# Altium PCB Super_Hornet.PcbDoc (part 2 of 4)
Units mil, origin at the board's own origin, x right, y up, seen from the top; angles counter-clockwise.
Board outline 6000 x 4000 mil, 2 copper layers (Top Layer, Bottom Layer); 166 components, 85 nets, 398 pads, 0 vias.
Unrouted connection lines stored in the file: 74.
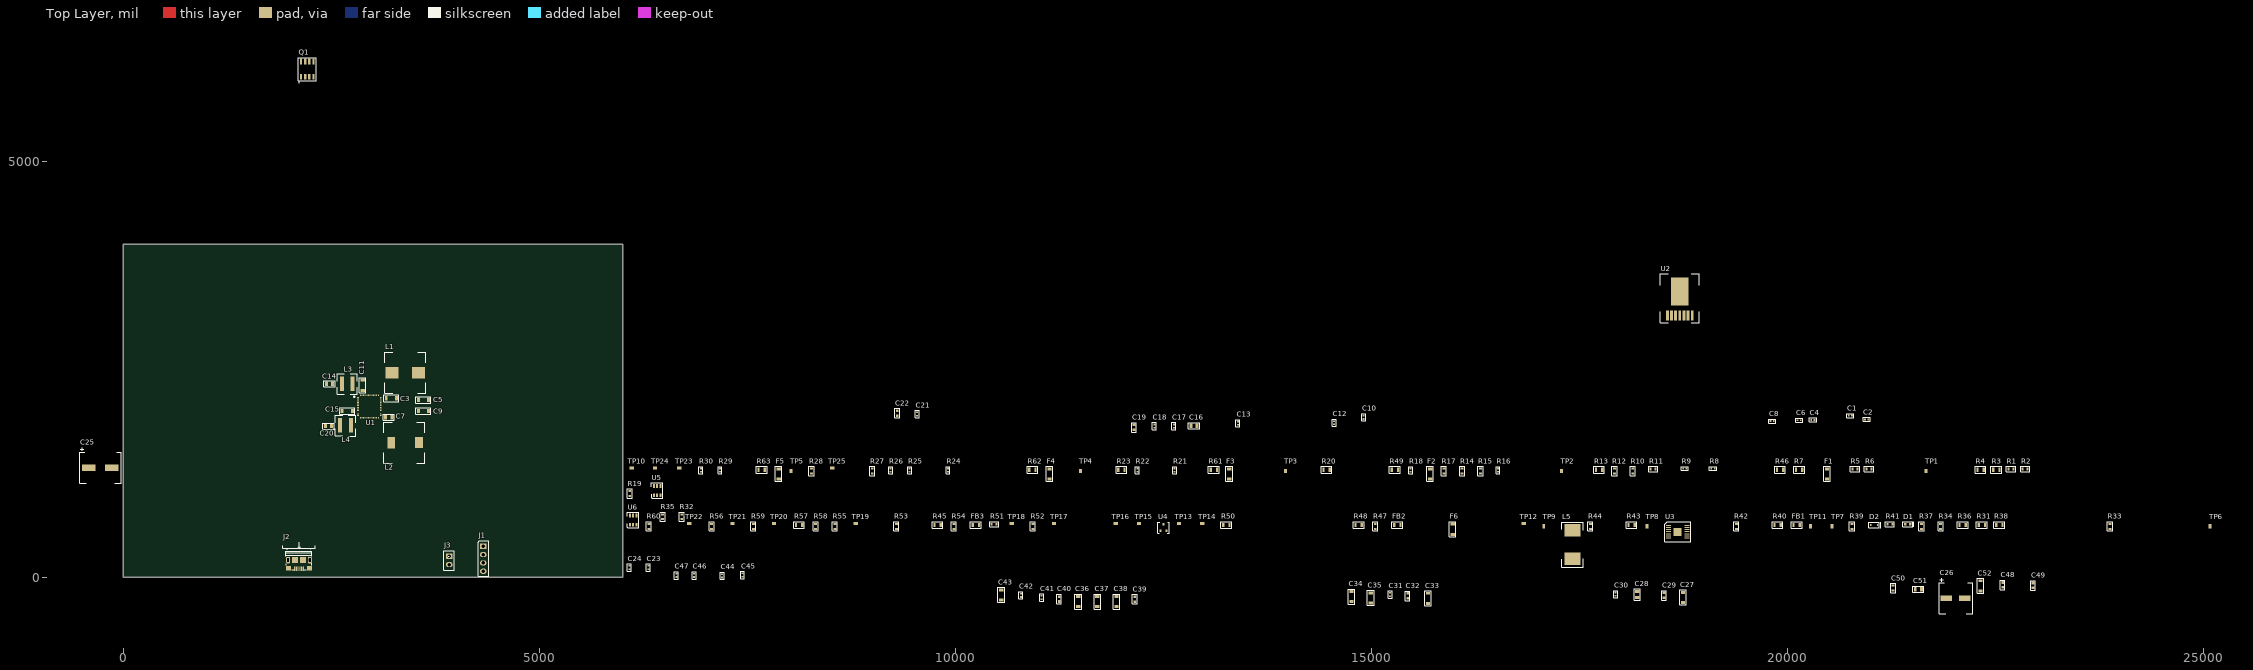
[diagram p0: Top Layer view]

## Part data (continued)
C51: "CAP CER 0.47UF 16V X7R 0805", Capacitance="470 nF", Case Size/Dimension=0805, Dielectric=X7R, Manufacturer="Kyocera AVX", Rated Voltage="16 V", Supplier Part Number 1=478-1403-1-ND, Tolerance (%)="±10 %", ComponentLink1Description=http://uk.rs-online.com/webdocs/0ed4/0900766b80ed4be2.pdf?src-supplier=RSComponents, ComponentLink1URL=http://uk.rs-online.com/webdocs/0ed4/0900766b80ed4be2.pdf?src-supplier=RSComponents, ComponentLink2Description=http://www.mouser.com/ds/2/40/X7RDielectric-777024.pdf?src-supplier=Mouser, ComponentLink2URL=http://www.mouser.com/ds/2/40/X7RDielectric-777024.pdf?src-supplier=Mouser, ComponentLink3Description=https://www.alliedelec.com/m/d/a24bb5190bea413b2ff164816f55e87c.pdf?src-supplier=Allied+Electronics, ComponentLink3URL=https://www.alliedelec.com/m/d/a24bb5190bea413b2ff164816f55e87c.pdf?src-supplier=Allied+Electronics, ComponentLink4Description=http://www.avx.com/docs/Catalogs/cx7r.pdf?src-supplier=Future+Electronics, ComponentLink4URL=http://www.avx.com/docs/Catalogs/cx7r.pdf?src-supplier=Future+Electronics, ComponentLink5Description=http://www.jameco.com/Jameco/Products/ProdDS/2011221.pdf?src-supplier=Jameco, ComponentLink5URL=http://www.jameco.com/Jameco/Products/ProdDS/2011221.pdf?src-supplier=Jameco, ComponentLink6Description=http://www.avx.com/docs/catalogs/cx7r.pdf?src-supplier=Avnet+Europe, ComponentLink6URL=http://www.avx.com/docs/catalogs/cx7r.pdf?src-supplier=Avnet+Europe, ComponentLink7Description=http://www.avx.com/docs/catalogs/cx7r.pdf?src-supplier=Avnet, ComponentLink7URL=http://www.avx.com/docs/catalogs/cx7r.pdf?src-supplier=Avnet, ComponentLink8Description=http://catalogs.avx.com/SurfaceMount.pdf?src-supplier=Digi-Key, ComponentLink8URL=http://catalogs.avx.com/SurfaceMount.pdf?src-supplier=Digi-Key, ComponentLink9Description=http://datasheets.avx.com/AutoMLCC.pdf?src-supplier=Avnet+Asia, ComponentLink9URL=http://datasheets.avx.com/AutoMLCC.pdf?src-supplier=Avnet+Asia, ComponentLink10Description=http://datasheets.avx.com/X7RDielectric.pdf?src-supplier=Digi-Key, ComponentLink10URL=http://datasheets.avx.com/X7RDielectric.pdf?src-supplier=Digi-Key, ComponentLink11Description=http://avx.com/docs/Catalogs/cx7r.pdf?src-supplier=Element14, ComponentLink11URL=http://avx.com/docs/Catalogs/cx7r.pdf?src-supplier=Element14, Manufacturer Part Number=0805YC474KAT2A, Pricing 1="1=0.25, 10=0.173, 50=0.104, 100=0.0878, 500=0.0601, 1000=0.0531 (USD)", Stock 1=203194, Supplier 1=Digi-Key
C52: "CAP CER 100UF 6.3V X5R 1206", Capacitance Value="100 uF", Dielectric=X5R, Manufacturer=Murata, Operating Temperature="-55 to 85 °C", Package/Case=1206, Supplier Part Number 1=490-7217-1-ND, Tolerance="20 %", Voltage="6.3 Vdc", Category="Capacitor Ceramic Multilayer", ComponentLink1Description=http://www.mouser.com/ds/2/281/GRM31A7U2H471JW31-01-1064911.pdf?src-supplier=Mouser, ComponentLink1URL=http://www.mouser.com/ds/2/281/GRM31A7U2H471JW31-01-1064911.pdf?src-supplier=Mouser, ComponentLink2Description=https://www.murata.com/~/media/webrenewal/support/library/catalog/products/capacitor/mlcc/c02e.ashx?la=en-us&src-supplier=Digi-Key, ComponentLink2URL=https://www.murata.com/~/media/webrenewal/support/library/catalog/products/capacitor/mlcc/c02e.ashx?la=en-us&src-supplier=Digi-Key, Construction=Flat, Manufacturer Part Number=GRM31CR60J107ME39K, Mounting="Surface Mount", Packaging="Tape & Reel", Pricing 1="1=1.08, 10=0.852, 100=0.6387, 500=0.4826, 1000=0.4258, 2500=0.3974 (USD)", Product Depth="1.6 mm", Product Height="1.6 mm", Product Length="3.2 mm", Rad Hard=No, Stock 1=190642, Supplier 1=Digi-Key
D1: "LED BLUE CLEAR 0603 SMD", If - Forward Current="5 mA", Illumination Color=Blue, Lens Color/Style="Water Clear", Manufacturer=Lumex, Maximum Operating Temperature="+ 85 C", Minimum Operating Temperature="- 40 C", Package / Case="0603 (1608 metric)", Power Rating="95 mW", Supplier Part Number 1=67-2225-1-ND, Vf - Forward Voltage="3 V", Vr - Reverse Voltage="5 V", Wavelength/Color Temperature="470 nm", Brand=Lumex, ComponentLink1Description=http://www.lumex.com/content/files/ProductAttachment/SML-LXFP0603USBCTR.pdf?src-supplier=Digi-Key, ComponentLink1URL=http://www.lumex.com/content/files/ProductAttachment/SML-LXFP0603USBCTR.pdf?src-supplier=Digi-Key, ComponentLink2Description=https://www.lumex.com/content/files/ProductAttachment/SML-LXFP0603USBCTR.pdf?src-supplier=Digi-Key, ComponentLink2URL=https://www.lumex.com/content/files/ProductAttachment/SML-LXFP0603USBCTR.pdf?src-supplier=Digi-Key, ComponentLink3Description=http://www.mouser.com/ds/2/244/SML-LXFP0603USBCTR-272434.pdf?src-supplier=Mouser, ComponentLink3URL=http://www.mouser.com/ds/2/244/SML-LXFP0603USBCTR-272434.pdf?src-supplier=Mouser, Factory Pack Quantity=3000, Height="0.2 mm", LED Size="1.6 mm x 0.8 mm x 0.2 mm", Length="1.6 mm", Lens Dimensions="1.6 mm x 0.8 mm", Lens Shape=Rectangular, Luminous Intensity="70 mcd", Manufacturer Part Number=SML-LXFP0603USBCTR, Mounting Style=SMD/SMT, Packaging=Reel, Peak Wavelength="470 nm", Pricing 1="1=0.77, 10=0.595, 100=0.3825, 500=0.323, 1000=0.255 (USD)", Product Category="Standard LEDs - SMD", RoHS=True, Series=FP0603, Stock 1=9920, Supplier 1=Digi-Key, Viewing Angle="130 deg", Wavelength="470 nm", Width="0.8 mm"
D2: "DIODE ZENER 5.1V 200MW SOD323", Ir - Reverse Current="5 uA", Manufacturer=Diodes, Maximum Operating Temperature="+ 150 C", Minimum Operating Temperature="- 65 C", Package / Case=SOD-323-2, Pd - Power Dissipation="200 mW", Supplier Part Number 1=MMSZ5231BS-FDICT-ND, Vf - Forward Voltage="0.9 V at 10 mA", Voltage Tolerance="5 %", Vz - Zener Voltage="5.1 V", Brand="Diodes Incorporated", ComponentLink1Description=http://www.diodes.com/datasheets/ds31038.pdf?src-supplier=Future+Electronics, ComponentLink1URL=http://www.diodes.com/datasheets/ds31038.pdf?src-supplier=Future+Electronics, ComponentLink2Description=http://www.diodes.com///datasheets/ds31038.pdf?src-supplier=Avnet, ComponentLink2URL=http://www.diodes.com///datasheets/ds31038.pdf?src-supplier=Avnet, ComponentLink3Description=http://www.diodes.com//datasheets/ds31038.pdf?src-supplier=Avnet, ComponentLink3URL=http://www.diodes.com//datasheets/ds31038.pdf?src-supplier=Avnet, ComponentLink4Description=http://www.diodes.com//datasheets/ds31038.pdf?src-supplier=Avnet+Europe, ComponentLink4URL=http://www.diodes.com//datasheets/ds31038.pdf?src-supplier=Avnet+Europe, Configuration=Single, Factory Pack Quantity=3000, Height="1 mm", Length="2.7 mm", Manufacturer Part Number=MMSZ5231BS-7-F, Mounting Style=SMD/SMT, Packaging=Reel, Pricing 1="1=0.26, 10=0.182, 100=0.097, 500=0.0556, 1000=0.0465 (USD)", Product="Zener Diode", Product Category="Zener Diodes", RoHS=True, Series=MMSZ523, Stock 1=36123, Supplier 1=Digi-Key, Termination Style=SMD/SMT, Unit Weight="0.000173 oz", Width="1.4 mm", Zener Current="5 uA", Zz - Zener Impedance="17 Ohms"
F1 F2 F3 F4 F5: "PTC FUSE 3A HOLD 6V 1206", Current - Hold (Ih) (Max)=3A, Current - Max=50A, Current - Trip (It)=6A, Manufacturer=Bourns, Operating Temperature="-40°C ~ 85°C", Package / Case="1206 (3216 Metric), Concave", Ratings=-, Resistance - Initial (Ri) (Min)="2.5 mOhms", Resistance - Post Trip (R1) (Max)="20 mOhms", Supplier Part Number 1=MF-NSML300-2CT-ND, Voltage - Max=6V, Approvals="cURus, TUV", Categories="Circuit Protection", ComponentLink1Description=https://www.bourns.com/docs/Product-Datasheets/mfnsml.pdf?src-supplier=Digi-Key, ComponentLink1URL=https://www.bourns.com/docs/Product-Datasheets/mfnsml.pdf?src-supplier=Digi-Key, ComponentLink2Description=http://www.bourns.com/docs/Product-Datasheets/mfnsml.pdf?src-supplier=Digi-Key, ComponentLink2URL=http://www.bourns.com/docs/Product-Datasheets/mfnsml.pdf?src-supplier=Digi-Key, ComponentLink3Description=http://www.farnell.com/datasheets/2339790.pdf?src-supplier=Farnell, ComponentLink3URL=http://www.farnell.com/datasheets/2339790.pdf?src-supplier=Farnell, Height - Seated (Max)=-, Lead Spacing=-, Manufacturer Part Number=MF-NSML300-2, Mounting Type="Surface Mount", Packaging="Cut Tape (CT)", Part Status=Active, Pricing 1="1=0.95, 5=0.92, 10=0.861, 50=0.7128, 100=0.594, 250=0.5792, 500=0.4901, 1000=0.4307 (USD)", Series="Multifuse®, MF-NSML", Size / Dimension="0.128 L x 0.063 W (3.25mm x 1.60mm)", Stock 1=1383, Supplier 1=Digi-Key, Thickness (Max)="0.024 (0.60mm)", Time to Trip=4s, Type=Polymeric
F6: "PTC FUSE 2A HOLD 4ATRIP 6V 50A 0.8W 1s", Current - Hold (Ih) (Max)=2A, Current - Max=50A, Current - Trip (It)=4A, Manufacturer=Bourns, Operating Temperature="-40°C ~ 85°C", Package / Case="1206 (3216 Metric), Concave", Ratings=-, Resistance - Initial (Ri) (Min)="5 mOhms", Resistance - Post Trip (R1) (Max)="25 mOhms", Supplier Part Number 1=MF-NSML200-2CT-ND, Voltage - Max=6V, Approvals="cURus, TUV", Categories="Circuit Protection", ComponentLink1Description=https://www.bourns.com/docs/Product-Datasheets/mfnsml.pdf?src-supplier=Digi-Key, ComponentLink1URL=https://www.bourns.com/docs/Product-Datasheets/mfnsml.pdf?src-supplier=Digi-Key, Height - Seated (Max)=-, Lead Spacing=-, Manufacturer Part Number=MF-NSML200-2, Mounting Type="Surface Mount", Packaging="Cut Tape (CT)", Part Status=Active, Pricing 1="1=0.95, 5=0.92, 10=0.861, 50=0.7128, 100=0.594, 250=0.5792, 500=0.4901, 1000=0.4307 (USD)", Series="Multifuse®, MF-NSML", Size / Dimension="0.128 L x 0.063 W (3.25mm x 1.60mm)", Stock 1=3983, Supplier 1=Digi-Key, Thickness (Max)="0.024 (0.60mm)", Time to Trip=1s, Type=Polymeric
FB1 FB3: library part HZ0805E601R-10, Current Rating (Max)=500mA, DC Resistance (DCR) (Max)="300 mOhm", Impedance @ Frequency="600 Ohm @ 100MHz", Manufacturer=Laird, Operating Temperature="-40°C ~ 125°C", Package / Case="0805 (2012 Metric)", Ratings=-, Standard Package=1, Supplier Part Number 1=240-2399-1-ND, Catalog Drawings="(HI,HZ,LI,MI)0805 Series_1.10mm Max. Height", Category=Filters, ComponentLink1Description=http://www.farnell.com/datasheets/1685710.pdf?src-supplier=Element14, ComponentLink1URL=http://www.farnell.com/datasheets/1685710.pdf?src-supplier=Element14, ComponentLink2Description=https://assets.lairdtech.com/home/brandworld/files/HZ0805E601R-10.pdf?src-supplier=Digi-Key, ComponentLink2URL=https://assets.lairdtech.com/home/brandworld/files/HZ0805E601R-10.pdf?src-supplier=Digi-Key, ComponentLink3Description=http://lairdtech.thomasnet.com/Asset/HZ0805E601R-10-A-VP.pdf?src-supplier=Avnet, ComponentLink3URL=http://lairdtech.thomasnet.com/Asset/HZ0805E601R-10-A-VP.pdf?src-supplier=Avnet, ComponentLink4Description=https://www.alliedelec.com/m/d/63159f83fbe70e1160794b0cc8ac128f.pdf?src-supplier=Allied+Electronics, ComponentLink4URL=https://www.alliedelec.com/m/d/63159f83fbe70e1160794b0cc8ac128f.pdf?src-supplier=Allied+Electronics, Family="Ferrite Beads and Chips", Filter Type="Signal Line", Height (Max)="0.043\" (1.10mm)", Kits="240-2227-ND  - KIT EMI FERRITE BEAD CHIP SMD", Manufacturer Part Number=HZ0805E601R-10, Mounting Type="Surface Mount", Number of Lines=1, Online Catalog="HZ Series", Other Names=240-2399-1, Packaging="Cut Tape (CT)", Pricing 1="1=0.17, 10=0.141, 25=0.1096, 50=0.0908, 100=0.0783, 250=0.0626, 500=0.0563, 1000=0.047 (USD)", Series=HZ, Size / Dimension="0.079\" L x 0.049\" W (2.00mm x 1.25mm)", Stock 1=529301, Supplier 1=Digi-Key
FB2: "IND 10UH 500MA 300 MOHM", Current - Saturation=110mA, Current Rating=500mA, DC Resistance (DCR)="390 mOhm Max", Frequency - Self Resonant=50MHz, Frequency - Test=2MHz, Inductance=10µH, Manufacturer=TDK, Operating Temperature="-55°C ~ 125°C", Package / Case="0805 (2012 Metric)", Q @ Freq=-, Standard Package=1, Supplier Part Number 1=445-6762-1-ND, Tolerance=±20%, Category="Inductors, Coils, Chokes", ComponentLink1Description=https://product.tdk.com/info/en/catalog/datasheets/inductor_commercial_decoupling_mlz2012_en.pdf?src-supplier=Digi-Key, ComponentLink1URL=https://product.tdk.com/info/en/catalog/datasheets/inductor_commercial_decoupling_mlz2012_en.pdf?src-supplier=Digi-Key, EDA / CAD Models="Download from Accelerated Designs", Family="Fixed Inductors", Height - Seated (Max)="0.057\" (1.45mm)", Manufacturer Part Number=MLZ2012N100LT000, Material - Core=Ferrite, Mounting Type="Surface Mount", Online Catalog="MLZ Series", Other Names=445-6762-6, Packaging=Digi-Reel®, Pricing 1="1=0.14, 10=0.129, 100=0.0863, 500=0.0719, 1000=0.0604 (USD)", Product Training Modules="SMD Inductors", Ratings=-, Series=MLZ, Shielding=Shielded, Size / Dimension="0.079\" L x 0.049\" W (2.00mm x 1.25mm)", Stock 1=55210, Supplier 1=Digi-Key, Type=Multilayer
J1: "CONN HEADER VERT 4POS 2.54MM", Color=Black, Manufacturer=Sullins, Standard Package=1, Supplier Part Number 1=S1011EC-04-ND, Category="Connectors, Interconnects", ComponentLink1Description=https://media.digikey.com/PDF/Data%20Sheets/Sullins%20PDFs/xRxCzzzSxxN-RC_ST_11635-B.pdf?src-supplier=Digi-Key, ComponentLink1URL=https://media.digikey.com/PDF/Data%20Sheets/Sullins%20PDFs/xRxCzzzSxxN-RC_ST_11635-B.pdf?src-supplier=Digi-Key, Connector Type="Header, Unshrouded, Breakaway", Contact Finish=Gold, Contact Finish Thickness=Flash, Contact Mating Length="0.230\" (5.84mm)", Contact Type="Male Pin", Family="Rectangular Connectors - Headers, Male Pins", Fastening Type=-, Features=-, Manufacturer Part Number=PRPC004SAAN-RC, Mounting Type="Through Hole", Number of Positions=4, Number of Positions Loaded=All, Number of Rows=1, Online Catalog="0.100\" (2.54mm) Pitch Connector Headers", Other Names="S9510E-04  S9510E-04-ND", Packaging=Bulk, Pitch="0.100\" (2.54mm)", Pricing 1="1=0.15, 10=0.146, 25=0.1084, 50=0.0928, 100=0.0898, 250=0.0774, 500=0.0743 (USD)", Row Spacing=-, Series=-, Stock 1=6923, Supplier 1=Digi-Key, Termination=Solder
J2: library part 10118193-0001LF_1, "USB - micro B USB 2.0 Receptacle Connector 5 Position Surface Mount, Right Angle, Horizontal", Color=Black, Current Rating="1.8 A", Flammability Rating="UL 94 V-0", Insulation Resistance="1000 MOhms", Manufacturer="Amphenol FCI", Operating Temperature Range="- 55 C to + 85 C", Supplier Part Number 1=649-10118193-0001LF, Brand=FCI, ComponentLink1Description=https://cdn.amphenol-icc.com/media/wysiwyg/files/documentation/datasheet/inputoutput/io_usb_micro.pdf?src-supplier=Digi-Key, ComponentLink1URL=https://cdn.amphenol-icc.com/media/wysiwyg/files/documentation/datasheet/inputoutput/io_usb_micro.pdf?src-supplier=Digi-Key, ComponentLink2Description=https://cdn.amphenol-icc.com/media/wysiwyg/files/documentation/datasheet/inputoutput/io_usb_micro.pdf?src-supplier=Arrow, ComponentLink2URL=https://cdn.amphenol-icc.com/media/wysiwyg/files/documentation/datasheet/inputoutput/io_usb_micro.pdf?src-supplier=Arrow, ComponentLink3Description=http://www.amphenol-icc.com/media/wysiwyg/files/drawing/10118193.pdf?src-supplier=Digi-Key, ComponentLink3URL=http://www.amphenol-icc.com/media/wysiwyg/files/drawing/10118193.pdf?src-supplier=Digi-Key, ComponentLink4Description=https://cdn.amphenol-icc.com/media/wysiwyg/files/documentation/datasheet/inputoutput/io_usb_micro.pdf?src-supplier=Verical, ComponentLink4URL=https://cdn.amphenol-icc.com/media/wysiwyg/files/documentation/datasheet/inputoutput/io_usb_micro.pdf?src-supplier=Verical, ComponentLink5Description=https://cdn.amphenol-icc.com/media/wysiwyg/files/documentation/datasheet/inputoutput/io_usb_micro.pdf?src-supplier=Allied+Electronics, ComponentLink5URL=https://cdn.amphenol-icc.com/media/wysiwyg/files/documentation/datasheet/inputoutput/io_usb_micro.pdf?src-supplier=Allied+Electronics, ComponentLink6Description=https://cdn.amphenol-icc.com/media/wysiwyg/files/documentation/datasheet/inputoutput/io_usb_micro.pdf?src-supplier=Mouser, ComponentLink6URL=https://cdn.amphenol-icc.com/media/wysiwyg/files/documentation/datasheet/inputoutput/io_usb_micro.pdf?src-supplier=Mouser, Connector Type="Micro USB Type B receptacle", Contact Material="Copper Alloy", Contact Plating=Gold, Factory Pack Quantity=1200, Gender=Female, Manufacturer Part Number=10118193-0001LF, Mounting Angle=Right, Number of Contacts="5 Contact", Packaging=Reel, Pricing 1="1=0.44, 10=0.304, 50=0.304, 100=0.292, 1000=0.251, 10000=0.179 (USD)", Product="Micro USB Type B Connectors", Product Category="USB Connectors", RoHS=Details, Standard="USB 2.0", Stock 1=78930, Supplier 1=Mouser, Termination Style=SMD/SMT
J3: "CONN HEADER VERT 2POS 2.54MM", Color=Black, Manufacturer="TE Connectivity", Standard Package=500, Supplier Part Number 1=A26543-ND, 3D Model=87224-2.pdf, Catalog Drawings="Single Square Straight Post /  / Single Square Straight Post Side", Category="Connectors, Interconnects", ComponentLink1Description=http://www1.futureelectronics.com/doc/TYCO%20ELECTRONICS/87224-2.pdf?src-supplier=Future+Electronics, ComponentLink1URL=http://www1.futureelectronics.com/doc/TYCO%20ELECTRONICS/87224-2.pdf?src-supplier=Future+Electronics, ComponentLink2Description=http://www.te.com/commerce/DocumentDelivery/DDEController?Action=srchrtrv&DocNm=1307819_AMPMODU&DocType=DS&DocLang=English&s_cid=1046&src-supplier=Avnet, ComponentLink2URL=http://www.te.com/commerce/DocumentDelivery/DDEController?Action=srchrtrv&DocNm=1307819_AMPMODU&DocType=DS&DocLang=English&s_cid=1046&src-supplier=Avnet, ComponentLink3Description=http://www.jameco.com/Jameco/Products/ProdDS/1934518.pdf?src-supplier=Jameco, ComponentLink3URL=http://www.jameco.com/Jameco/Products/ProdDS/1934518.pdf?src-supplier=Jameco, ComponentLink4Description=http://www.tycoelectronics.com/commerce/DocumentDelivery/DDEController?Action=srchrtrv&DocNm=1307819_SECTION_5&DocType=Catalog+Section&DocLang=English&src-supplier=Element14, ComponentLink4URL=http://www.tycoelectronics.com/commerce/DocumentDelivery/DDEController?Action=srchrtrv&DocNm=1307819_SECTION_5&DocType=Catalog+Section&DocLang=English&src-supplier=Element14, ComponentLink5Description=http://uk.rs-online.com/webdocs/0fa3/0900766b80fa3622.pdf?src-supplier=RSComponents, ComponentLink5URL=http://uk.rs-online.com/webdocs/0fa3/0900766b80fa3622.pdf?src-supplier=RSComponents, ComponentLink6Description=https://www.te.com/commerce/DocumentDelivery/DDEController?Action=srchrtrv&DocNm=87224&DocType=Customer+Drawing&DocLang=English&src-supplier=Digi-Key, ComponentLink6URL=https://www.te.com/commerce/DocumentDelivery/DDEController?Action=srchrtrv&DocNm=87224&DocType=Customer+Drawing&DocLang=English&src-supplier=Digi-Key, ComponentLink7Description=https://www.alliedelec.com/m/d/7f3d665b792b1bf5eb695b1e5eb12d29.pdf?src-supplier=Allied+Electronics, ComponentLink7URL=https://www.alliedelec.com/m/d/7f3d665b792b1bf5eb695b1e5eb12d29.pdf?src-supplier=Allied+Electronics, Connector Type="Header, Unshrouded", Contact Finish=Gold, Contact Finish Thickness="15µin (0.38µm)", Contact Mating Length="0.318\" (8.08mm)", Contact Type="Male Pin", Dynamic Catalog="AMPMODU Mod II Series", Family="Rectangular Connectors - Headers, Male Pins", Featured Product="AMPMODU Connectors", Manufacturer Part Number=87224-2, Mating Products="A26921-ND / - CONN HOUSING 2POS .100 LOCKING / A26963-ND / - CONN HOUSING 2POS .100 SINGLE / A3011-ND / - CONN HOUSING 2POS .100 SINGLE", Mounting Type="Through Hole", Number of Positions=2, Number of Positions Loaded=All, Number of Rows=1, Other Names="87224-2-ND / A26543", Packaging=Bulk, Pitch="0.100\" (2.54mm)", Pricing 1="1=1.01, 10=0.886, 100=0.7644, 500=0.6254, 1000=0.5559, 5000=0.4864, 10000=0.4621 (USD)", RoHS Information="87224-2 Statement of Compliance", Series="AMPMODU Mod II", Stock 1=17290, Supplier 1=Digi-Key, Termination=Solder
L1: "FIXED IND 4.3UH 8A 14.1 MOHM SMD", Current - Saturation=8A, DC Resistance (DCR)="14.1 mOhm", Frequency - Self Resonant=33MHz, Frequency - Test=100kHz, Inductance=4.3µH, Manufacturer="Wurth Electronics", Operating Temperature="-40°C ~ 155°C", Package / Case=Nonstandard, Standard Package=1, Supplier Part Number 1=732-1136-1-ND, Tolerance=±20%, 3D Model="WE-HCI_1040_7443552.igs WE-HCI_1040_7443552.stp", Catalog Drawings="7443552 Series Top 7443552 Series Side 7443552 Series Bottom", Category="Inductors, Coils, Chokes", ComponentLink1Description=https://katalog.we-online.de/pbs/datasheet/7443552430.pdf?src-supplier=Digi-Key, ComponentLink1URL=https://katalog.we-online.de/pbs/datasheet/7443552430.pdf?src-supplier=Digi-Key, ComponentLink2Description=http://documents.rs-components.com/techlib://itc_doclist_GB.htm?stockno=7362080&src-supplier=RSComponents, ComponentLink2URL=http://documents.rs-components.com/techlib://itc_doclist_GB.htm?stockno=7362080&src-supplier=RSComponents, ComponentLink3Description=http://www.farnell.com/datasheets/1735722.pdf?src-supplier=Element14, ComponentLink3URL=http://www.farnell.com/datasheets/1735722.pdf?src-supplier=Element14, ComponentLink4Description=https://www.distrelec.biz/Web/Downloads/a_/de/np7443552430_data_DE.pdf?mime=application%2Fpdf&src-supplier=Distrelec, ComponentLink4URL=https://www.distrelec.biz/Web/Downloads/a_/de/np7443552430_data_DE.pdf?mime=application%2Fpdf&src-supplier=Distrelec, ComponentLink5Description=http://www.mouser.com/ds/2/445/7443552430-538587.pdf?src-supplier=Mouser, ComponentLink5URL=http://www.mouser.com/ds/2/445/7443552430-538587.pdf?src-supplier=Mouser, Current Rating=8A, Design Resources="Spice Model Library", Family="Fixed Inductors", Featured Product="Flat Wire High Current Inductors WE-HCI – SMD Flat Wire High Current Inductor", Height - Seated (Max)="0.165\" (4.20mm)", Kits="732-1921-ND  /                                                          - KIT INDUCTOR HC/HCA SMALL SIZES", Manufacturer Part Number=7443552430, Mounting Type="Surface Mount", Online Catalog="WE-HCI Series", Other Names=732-1136-1, Packaging="Cut Tape (CT)", Pricing 1="1=2.67, 10=2.621, 50=2.419, 100=2.318 (USD)", Related Products="122-1853-ND  /                                                          - IC SOC CORTEX-A9 ARTIX-7 225BGA /                                                      122-1852-ND  /                                                          - IC SOC CORTEX-A9 ARTIX-7 400BGA /                                                      122-1963-ND  /                                                          - IC SOC CORTEX-A9 ARTIX-7 400BGA /                                                      122-1855-ND  /                                                          - IC SOC CORTEX-A9 ARTIX-7 225BGA /                                                      122-1854-ND  /                                                          - IC SOC CORTEX-A9 ARTIX-7 400BGA /                                                      497-8821-2-ND  /                                                          - IC REG BUCK ADJ 4A SYNC 16HTSSOP /                                                      497-8821-1-ND  /                                                          - IC REG BUCK ADJ 4A SYNC 16HTSSOP /                                                      497-8821-6-ND  /                                                          - IC REG BUCK ADJ 4A SYNC 16HTSSOP /                                                      L5989D-ND  /                                                          - IC REG BUCK ADJ 4A SYNC 16HTSSOP /                                                      XC7Z010-1CLG225I-ND  /                                                          - IC SOC CORTEX-A9 ARTIX-7 225BGA /                                                      XC7Z010-2CLG225E-ND  /                                                          - IC SOC CORTEX-A9 ARTIX-7 225BGA /                                                      XC7Z010-2CLG400E-ND  /                                                          - IC SOC CORTEX-A9 ARTIX-7 400BGA /                                                      XC7Z010-3CLG225E-ND  /                                                          - IC SOC CORTEX-A9 ARTIX-7 225BGA /                                                      XC7Z010-3CLG400E-ND  /                                                          - IC SOC CORTEX-A9 ARTIX-7 400BGA", Series=WE-HCI, Shielding=Shielded, Size / Dimension="0.413\" L x 0.402\" W (10.50mm x 10.20mm)", Stock 1=1440, Supplier 1=Digi-Key, Type=Wirewound
L2: "IND 2.5UH 13.7A 4.95 MOHM", Current - Saturation=10.1A, Current Rating=13.7A, DC Resistance (DCR)="4.95 mOhm Max", Frequency - Self Resonant=57MHz, Frequency - Test=100kHz, Inductance=2.5µH, Manufacturer="Wurth Electronics", Operating Temperature="-40°C ~ 150°C", Package / Case=Nonstandard, Standard Package=1, Supplier Part Number 1=732-2418-1-ND, Tolerance=±30%, 3D Model="7447798zzz.igs 7447798zzz.stp", Catalog Drawings="744779 Series Bottom 744779 Series Top 744779 Series_6.4mm Height-Side", Category="Inductors, Coils, Chokes", ComponentLink1Description=https://katalog.we-online.de/pbs/datasheet/7447798250.pdf?src-supplier=Digi-Key, ComponentLink1URL=https://katalog.we-online.de/pbs/datasheet/7447798250.pdf?src-supplier=Digi-Key, ComponentLink2Description=http://katalog.we-online.de/pbs/datasheet/7447798250.pdf?src-supplier=Digi-Key, ComponentLink2URL=http://katalog.we-online.de/pbs/datasheet/7447798250.pdf?src-supplier=Digi-Key, ComponentLink3Description=http://www.mouser.com/ds/2/445/7447798250-539040.pdf?src-supplier=Mouser, ComponentLink3URL=http://www.mouser.com/ds/2/445/7447798250-539040.pdf?src-supplier=Mouser, ComponentLink4Description=http://documents.rs-components.com/techlib://itc_doclist_GB.htm?stockno=7444965&src-supplier=RSComponents, ComponentLink4URL=http://documents.rs-components.com/techlib://itc_doclist_GB.htm?stockno=7444965&src-supplier=RSComponents, ComponentLink5Description=http://www.farnell.com/datasheets/1915042.pdf?src-supplier=Farnell, ComponentLink5URL=http://www.farnell.com/datasheets/1915042.pdf?src-supplier=Farnell, Design Resources="Spice Model Library", Family="Fixed Inductors", Height - Seated (Max)="0.252\" (6.40mm)", Manufacturer Part Number=7447798250, Material - Core="Metal Composite", Mounting Type="Surface Mount", Online Catalog="WE-PDF Series", Other Names=732-2418-6, Packaging=Digi-Reel®, Pricing 1="1=3.34, 10=3.086, 50=2.979, 100=2.873, 250=2.554 (USD)", Product Training Modules="High Current Inductors with Flatwire Technology for Low Wire Losses", Related Products="NCP3170ADR2GOSTR-ND  /                                                          - IC REG BUCK ADJ 3A SYNC 8SOIC /                                                      NCP3170ADR2GOSCT-ND  /                                                          - IC REG BUCK ADJ 3A SYNC 8SOIC /                                                      NCP3170ADR2GOSDKR-ND  /                                                          - IC REG BUCK ADJ 3A SYNC 8SOIC /                                                      NCP3170BDR2GOSTR-ND  /                                                          - IC REG BUCK ADJ 3A SYNC 8SOIC /                                                      NCP3170BDR2GOSCT-ND  /                                                          - IC REG BUCK ADJ 3A SYNC 8SOIC /                                                      NCP3170BDR2GOSDKR-ND  /                                                          - IC REG BUCK ADJ 3A SYNC 8SOIC", Series=WE-PDF, Shielding=Shielded, Size / Dimension="0.402\" L x 0.402\" W (10.20mm x 10.20mm)", Stock 1=78, Supplier 1=Digi-Key, Type=Wirewound
L3 L4: "Power inductor, shielded, 20% tol, SMT, RoHS, halogen f", Case Height="5.1 mm", Case Length="5.68 mm", Case Width="5.48 mm", Inductance="8.2 uH", Manufacturer=Coilcraft, Maximum DC Current="6.1 A", Maximum DC Resistance="34.95 mOhms", Operating Temperature Range="- 40 C to + 125 C", Self Resonant Frequency="18 MHz", Supplier Part Number 1=994-XAL5050-822MEB, Test Frequency="100 kHz", Tolerance="20 %", Brand=Coilcraft, Core Material=Composite, Dimensions="5.48 mm W x 5.68 mm L x 5.1 mm H", Factory Pack Quantity=20, Manufacturer Part Number=XAL5050-822MEB, Packaging=Reel, Part # Aliases=XAL5050-822MEC, Pricing 1="1=2.57, 10=2.3, 50=2.2, 100=2.2, 250=2.2, 500=1.44 (USD)", Product="Power Inductors", Product Category="Fixed Inductors", RoHS=Details, Series=XAL5050, Shielding=Shielded, Stock 1=1232, Supplier 1=Mouser, Termination Style=SMD/SMT
L5: "IND 2.2UH 12A 7.5MOHM", Current - Saturation=12.2A, Current Rating=12A, DC Resistance (DCR)="7.5 mOhm Max", Frequency - Self Resonant=-, Inductance=2.2µH, Inductance Frequency - Test=100kHz, Manufacturer=TDK, Operating Temperature="-40°C ~ 125°C", Package / Case=Nonstandard, Supplier Part Number 1=445-175126-1-ND, Tolerance=±20%, Categories="Inductors, Coils, Chokes", ComponentLink1Description=https://product.tdk.com/info/en/catalog/datasheets/inductor_commercial_power_spm10040_en.pdf?src-supplier=Digi-Key, ComponentLink1URL=https://product.tdk.com/info/en/catalog/datasheets/inductor_commercial_power_spm10040_en.pdf?src-supplier=Digi-Key, Features=-, Height - Seated (Max)="0.157 (4.00mm)", Manufacturer Part Number=SPM10040T-2R2M, Material - Core=Metal, Mounting Type="Surface Mount", Packaging="Tape & Reel (TR)", Part Status=Active, Pricing 1="1=1.54, 10=1.43, 25=1.32, 50=1.1, 100=1.034, 250=0.924 (USD)", Q @ Freq=-, Ratings=-, Series=SPM, Shielding=Shielded, Size / Dimension="0.421 L x 0.394 W (10.70mm x 10.00mm)", Stock 1=2304, Supplier 1=Digi-Key, Supplier Device Package=-, Type=Wirewound
Q1: "MOSFET; Transistor Polarity:-; Continuous Drain Current Id:-; Drain Source Voltage Vds:-; On Resistance Rds(on):-; Rds(on) Test Voltage Vgs:-; Threshold Voltage Vgs:-; Power Dissipation Pd:-; Operating Temperature Max:- ;RoHS Compliant: No", Manufacturer="International Rectifier", Supplier Part Number 1=IRF8910PBFCT-ND, ComponentLink1Description=http://datasheet.iiic.cc/international_rectifier/IRF8910.pdf?src-supplier=IIIC, ComponentLink1URL=http://datasheet.iiic.cc/international_rectifier/IRF8910.pdf?src-supplier=IIIC, Manufacturer Part Number=IRF8910, Pricing 1="1=0.85, 10=0.763, 25=0.7248, 100=0.5435, 250=0.5383, 500=0.4607, 1000=0.3753 (USD)", Stock 1=0, Supplier 1=Digi-Key
R1: "RES SMD 4.64K OHM 1% 1/10W 0603", Manufacturer=Panasonic, Power Rating=100mW, Resistance=4.64K, Resistance Tolerance="± 1%", Resistor Case Style="0603 [1608 Metric]", Resistor Element Material="Thick Film", Resistor Mounting=SMD, Supplier Part Number 1=P4.64KHCT-ND, Temperature Coefficient="± 100ppm/°C", Voltage Rating=75V, ComponentLink1Description=http://www.farnell.com/datasheets/426256.pdf?src-supplier=Farnell, ComponentLink1URL=http://www.farnell.com/datasheets/426256.pdf?src-supplier=Farnell, ComponentLink2Description=http://www.farnell.com/datasheets/426256.pdf?src-supplier=Element14, ComponentLink2URL=http://www.farnell.com/datasheets/426256.pdf?src-supplier=Element14, ComponentLink3Description=https://www.alliedelec.com/m/d/623f45ff1957d936ff56d46fd1c28cac.pdf?src-supplier=Allied+Electronics, ComponentLink3URL=https://www.alliedelec.com/m/d/623f45ff1957d936ff56d46fd1c28cac.pdf?src-supplier=Allied+Electronics, ComponentLink4Description=http://www.mouser.com/ds/2/315/AOA0000CE2-37512.pdf?src-supplier=Mouser, ComponentLink4URL=http://www.mouser.com/ds/2/315/AOA0000CE2-37512.pdf?src-supplier=Mouser, Manufacturer Part Number=ERJ-3EKF4641V, MSL="(Not Applicable)", Packaging="Cut Tape", Pricing 1="1=0.1, 10=0.054, 100=0.0219, 1000=0.0099, 2500=0.0086 (USD)", Product Range="PANASONIC - ERJ Series", Resistor Element Type="Thick Film", Stock 1=27560, Supplier 1=Digi-Key, SVHC="Diboron trioxide (19-Dec-2012)", SVHC (Secondary)="Lead monoxide (lead oxide) (19-Dec-2012)"
R2 R11: "RES SMD 9.53K OHM 1% 1/10W 0603", Manufacturer=Panasonic, Operating Temperature="-55°C ~ 155°C", Package / Case="0603 (1608 Metric)", Power (Watts)="0.1W, 1/10W", Resistance (Ohms)=9.53K, Standard Package=1, Supplier Device Package=0603, Supplier Part Number 1=P9.53KHCT-ND, Temperature Coefficient=±100ppm/°C, Tolerance=±1%, Category=Resistors, ComponentLink1Description=http://www.farnell.com/datasheets/1678782.pdf?src-supplier=Element14, ComponentLink1URL=http://www.farnell.com/datasheets/1678782.pdf?src-supplier=Element14, ComponentLink2Description=http://industrial.panasonic.com/www-data/pdf/AOA0000/AOA0000CE2.pdf?src-supplier=Avnet+Asia, ComponentLink2URL=http://industrial.panasonic.com/www-data/pdf/AOA0000/AOA0000CE2.pdf?src-supplier=Avnet+Asia, ComponentLink3Description=http://www.farnell.com/datasheets/426256.pdf?src-supplier=Element14, ComponentLink3URL=http://www.farnell.com/datasheets/426256.pdf?src-supplier=Element14, ComponentLink4Description=http://www.farnell.com/datasheets/1911175.pdf?src-supplier=Farnell, ComponentLink4URL=http://www.farnell.com/datasheets/1911175.pdf?src-supplier=Farnell, ComponentLink5Description=https://www.alliedelec.com/m/d/623f45ff1957d936ff56d46fd1c28cac.pdf?src-supplier=Allied+Electronics, ComponentLink5URL=https://www.alliedelec.com/m/d/623f45ff1957d936ff56d46fd1c28cac.pdf?src-supplier=Allied+Electronics, ComponentLink6Description=http://industrial.panasonic.com/www-data/pdf/AOA0000/AOA0000CE2.pdf?src-supplier=Avnet, ComponentLink6URL=http://industrial.panasonic.com/www-data/pdf/AOA0000/AOA0000CE2.pdf?src-supplier=Avnet, Composition="Thick Film", EDA / CAD Models="Download from Accelerated Designs", Family="Chip Resistor - Surface Mount", Features="Automotive AEC-Q200", Height="0.022\" (0.55mm)", Kits="RSM3H-ND  - RES KIT 1K-9.76K 1/10W 4800PCS", Manufacturer Part Number=ERJ-3EKF9531V, Number of Terminations=2, Online Catalog="ERJ Series", Other Names="ERJ-3EKF9531 ERJ3EKF9531 P9.53KHCT", Packaging="Cut Tape (CT)", Pricing 1="1=0.1, 10=0.042, 100=0.0169, 1000=0.0076, 2500=0.0066 (USD)", Series=ERJ, Size / Dimension="0.063\" L x 0.031\" W (1.60mm x 0.80mm)", Stock 1=49914, Supplier 1=Digi-Key
R3: "RES SMD 13.3K OHM 1% 1/8W 0805", Manufacturer=Vishay, Operating Temperature="-55°C ~ 155°C", Package / Case="0805 (2012 Metric)", Power (Watts)="0.125W, 1/8W", Resistance (Ohms)=13.3K, Standard Package=10, Supplier Part Number 1=541-13.3KCCT-ND, Temperature Coefficient=±100ppm/°C, Tolerance=±1%, Category=Resistors, ComponentLink1Description=http://www.vishay.com/docs/20035/dcrcwe3.pdf?src-supplier=Digi-Key, ComponentLink1URL=http://www.vishay.com/docs/20035/dcrcwe3.pdf?src-supplier=Digi-Key, ComponentLink2Description=http://www.farnell.com/datasheets/1697337.pdf?src-supplier=Element14, ComponentLink2URL=http://www.farnell.com/datasheets/1697337.pdf?src-supplier=Element14, ComponentLink3Description=http://www.vishay.com/docs/20035/dcrcwe3.pdf?src-supplier=Avnet, ComponentLink3URL=http://www.vishay.com/docs/20035/dcrcwe3.pdf?src-supplier=Avnet, ComponentLink4Description=http://www.mouser.com/ds/2/427/dcrcwe3-109170.pdf?src-supplier=Mouser, ComponentLink4URL=http://www.mouser.com/ds/2/427/dcrcwe3-109170.pdf?src-supplier=Mouser, ComponentLink5Description=http://www.vishay.com/docs/20035/dcrcwe3.pdf?src-supplier=Avnet+Europe, ComponentLink5URL=http://www.vishay.com/docs/20035/dcrcwe3.pdf?src-supplier=Avnet+Europe, ComponentLink6Description=http://uk.rs-online.com/webdocs/0d98/0900766b80d98b26.pdf?src-supplier=RSComponents, ComponentLink6URL=http://uk.rs-online.com/webdocs/0d98/0900766b80d98b26.pdf?src-supplier=RSComponents, ComponentLink7Description=http://www.vishay.com/docs/20008/dcrcw.pdf?src-supplier=Future+Electronics, ComponentLink7URL=http://www.vishay.com/docs/20008/dcrcw.pdf?src-supplier=Future+Electronics, ComponentLink8Description=https://www.alliedelec.com/m/d/0c934d6939ccefa68dbe0b96d821c8cf.pdf?src-supplier=Allied+Electronics, ComponentLink8URL=https://www.alliedelec.com/m/d/0c934d6939ccefa68dbe0b96d821c8cf.pdf?src-supplier=Allied+Electronics, ComponentLink9Description=http://www.farnell.com/datasheets/2111203.pdf?src-supplier=Element14, ComponentLink9URL=http://www.farnell.com/datasheets/2111203.pdf?src-supplier=Element14, Composition="Thick Film", EDA / CAD Models="Download from Accelerated Designs", Family="Chip Resistor - Surface Mount", Features="Automotive AEC-Q200", Height="0.020\" (0.50mm)", Kits="541-1420-ND  - RESISTOR KIT 0-1M 1/8W 6100PCS", Manufacturer Part Number=CRCW080513K3FKEA, Number of Terminations=2, Online Catalog="CRCW - Automotive Series", Other Names=541-13.3KCCT, Packaging="Cut Tape (CT)", Pricing 1="1=0.1, 10=0.062, 100=0.0254, 1000=0.0114, 2500=0.0099 (USD)", Series=CRCW, Size / Dimension="0.079\" L x 0.049\" W (2.00mm x 1.25mm)", Stock 1=38417, Supplier 1=Digi-Key, Supplier Device Package="0805 (2012 Metric)"
R4: "RES SMD 41.2K OHM 1% 1/8W 0805", Case Code - in=0805, Case Code - mm=2012, Case Height="0.45 mm", Case Length="2 mm", Case Width="1.25 mm", Manufacturer=Vishay, Operating Temperature Range="- 55 C to + 155 C", Package / Case="0805 (2012 metric)", Power Rating="125 mW (1/8 W)", Resistance=41.2K, Supplier Part Number 1=541-41.2KCCT-ND, Temperature Coefficient="100 PPM / K", Tolerance="1 %", Voltage Rating="150 V", Brand="Vishay / Dale", ComponentLink1Description=http://www.vishay.com/docs/20035/dcrcwe3.pdf?src-supplier=Digi-Key, ComponentLink1URL=http://www.vishay.com/docs/20035/dcrcwe3.pdf?src-supplier=Digi-Key, ComponentLink2Description=http://www.farnell.com/datasheets/2049244.pdf?src-supplier=Element14, ComponentLink2URL=http://www.farnell.com/datasheets/2049244.pdf?src-supplier=Element14, ComponentLink3Description=http://www.vishay.com/docs/20035/dcrcwe3.pdf?src-supplier=Future+Electronics, ComponentLink3URL=http://www.vishay.com/docs/20035/dcrcwe3.pdf?src-supplier=Future+Electronics, ComponentLink4Description=http://www.vishay.com/docs/20035/dcrcwe3.pdf?src-supplier=Avnet, ComponentLink4URL=http://www.vishay.com/docs/20035/dcrcwe3.pdf?src-supplier=Avnet, ComponentLink5Description=http://www.mouser.com/ds/2/427/dcrcwe3-109170.pdf?src-supplier=Mouser, ComponentLink5URL=http://www.mouser.com/ds/2/427/dcrcwe3-109170.pdf?src-supplier=Mouser, ComponentLink6Description=http://www.farnell.com/datasheets/1697337.pdf?src-supplier=Element14, ComponentLink6URL=http://www.farnell.com/datasheets/1697337.pdf?src-supplier=Element14, Factory Pack Quantity=5000, Manufacturer Part Number=CRCW080541K2FKEA, Packaging=Reel, Pricing 1="1=0.1, 10=0.062, 100=0.0254, 1000=0.0114, 2500=0.0099 (USD)", Product="Thick Film Resistors SMD", Product Category="Thick Film Resistors - SMD", RoHS=Details, Series=CRCW, Stock 1=6153, Supplier 1=Digi-Key, Unit Weight="0.000194 oz"
R5 R15 R17 R44 R53 R54: "RES SMD 10K OHM 1% 1/10W 0603", Manufacturer=Panasonic, Rated Power="0.1 W", Resistance=10K, Supplier Part Number 1=P10.0KHDKR-ND, Temp Coefficient="100 ppm/C", Tolerance (%)="1 %", ComponentLink1Description=https://industrial.panasonic.com/cdbs/www-data/pdf/RDA0000/DMA0000COL11.pdf?src-supplier=Avnet+Asia, ComponentLink1URL=https://industrial.panasonic.com/cdbs/www-data/pdf/RDA0000/DMA0000COL11.pdf?src-supplier=Avnet+Asia, ComponentLink2Description=http://www.farnell.com/datasheets/1911175.pdf?src-supplier=Element14, ComponentLink2URL=http://www.farnell.com/datasheets/1911175.pdf?src-supplier=Element14, ComponentLink3Description=https://industrial.panasonic.com/cdbs/www-data/pdf/RDA0000/DMA0000COL11.pdf?src-supplier=Avnet, ComponentLink3URL=https://industrial.panasonic.com/cdbs/www-data/pdf/RDA0000/DMA0000COL11.pdf?src-supplier=Avnet, ComponentLink4Description=http://industrial.panasonic.com/www-data/pdf/AOA0000/AOA0000CE2.pdf?src-supplier=Avnet+Europe, ComponentLink4URL=http://industrial.panasonic.com/www-data/pdf/AOA0000/AOA0000CE2.pdf?src-supplier=Avnet+Europe, ComponentLink5Description=http://industrial.panasonic.com/www-data/pdf/AOA0000/AOA0000CE2.pdf?src-supplier=Avnet, ComponentLink5URL=http://industrial.panasonic.com/www-data/pdf/AOA0000/AOA0000CE2.pdf?src-supplier=Avnet, ComponentLink6Description=https://industrial.panasonic.com/cdbs/www-data/pdf/RDA0000/DMA0000COL11.pdf?src-supplier=Mouser, ComponentLink6URL=https://industrial.panasonic.com/cdbs/www-data/pdf/RDA0000/DMA0000COL11.pdf?src-supplier=Mouser, ComponentLink7Description=https://industrial.panasonic.com/cdbs/www-data/pdf/RDA0000/DMA0000COL11.pdf?src-supplier=Allied+Electronics, ComponentLink7URL=https://industrial.panasonic.com/cdbs/www-data/pdf/RDA0000/DMA0000COL11.pdf?src-supplier=Allied+Electronics, Manufacturer Part Number=ERJ-3EKF1002V, Pricing 1="1=0.1, 10=0.06, 100=0.0244, 1000=0.0109, 2500=0.0095 (USD)", Size Code=0603, Stock 1=2668173, Supplier 1=Digi-Key
R6 R27 R28: "RES SMD 0 OHM JUMPER 1/10W 0402", Manufacturer=Panasonic, Operating Temperature="-55°C ~ 155°C", Package / Case="0402 (1005 Metric)", Power (Watts)="0.1W, 1/10W", Resistance (Ohms)=0R, Standard Package=1, Supplier Device Package=0402, Supplier Part Number 1=P0.0JDKR-ND, Temperature Coefficient=-, Tolerance=Jumper, Category=Resistors, ComponentLink1Description=http://industrial.panasonic.com/www-data/pdf/AOA0000/AOA0000CE1.pdf?src-supplier=Avnet, ComponentLink1URL=http://industrial.panasonic.com/www-data/pdf/AOA0000/AOA0000CE1.pdf?src-supplier=Avnet, ComponentLink2Description=http://www.alliedelec.com/m/d/51cd0790071e1666bdb9d00c57fcf960.pdf?src-supplier=Allied+Electronics, ComponentLink2URL=http://www.alliedelec.com/m/d/51cd0790071e1666bdb9d00c57fcf960.pdf?src-supplier=Allied+Electronics, ComponentLink3Description=http://industrial.panasonic.com/www-data/pdf/AOA0000/AOA0000CE1.pdf?src-supplier=Avnet+Europe, ComponentLink3URL=http://industrial.panasonic.com/www-data/pdf/AOA0000/AOA0000CE1.pdf?src-supplier=Avnet+Europe, ComponentLink4Description=http://industrial.panasonic.com/cdbs/www-data/pdf/RDA0000/AOA0000C301.pdf?src-supplier=Farnell, ComponentLink4URL=http://industrial.panasonic.com/cdbs/www-data/pdf/RDA0000/AOA0000C301.pdf?src-supplier=Farnell, ComponentLink5Description=http://www.farnell.com/datasheets/1678796.pdf?src-supplier=Element14, ComponentLink5URL=http://www.farnell.com/datasheets/1678796.pdf?src-supplier=Element14, ComponentLink6Description=http://www.farnell.com/datasheets/2059623.pdf?src-supplier=Element14, ComponentLink6URL=http://www.farnell.com/datasheets/2059623.pdf?src-supplier=Element14, Composition="Thick Film", EDA / CAD Models="Download from Accelerated Designs", Family="Chip Resistor - Surface Mount", Features="Automotive AEC-Q200", Height="0.016\" (0.40mm)", Manufacturer Part Number=ERJ-2GE0R00X, Number of Terminations=2, Online Catalog="ERJ Series", Other Names=P0.0JDKR, Packaging=Digi-Reel®, Pricing 1="1=0.1, 10=0.027, 25=0.0196, 50=0.015, 100=0.0111, 250=0.0085, 500=0.0068, 1000=0.005, 5000=0.0036 (USD)", Series=ERJ, Size / Dimension="0.039\" L x 0.020\" W (1.00mm x 0.50mm)", Stock 1=11761060, Supplier 1=Digi-Key
R7 R57: "RES SMD 8.25K OHM 1% 1/8W 0805", Manufacturer=Panasonic, Power Rating=125mW, Resistance=8.25K, Resistance Tolerance="± 1%", Resistor Case Style="0805 ^2012 Metric]", Resistor Element Type="Thick Film", Supplier Part Number 1=P8.25KCCT-ND, Temperature Coefficient="± 100ppm/°C", Voltage Rating=150V, ComponentLink1Description=http://industrial.panasonic.com/www-data/pdf/AOA0000/AOA0000CE2.pdf?src-supplier=Avnet+Europe, ComponentLink1URL=http://industrial.panasonic.com/www-data/pdf/AOA0000/AOA0000CE2.pdf?src-supplier=Avnet+Europe, ComponentLink2Description=http://www.jameco.com/Jameco/Products/ProdDS/1989586.pdf?src-supplier=Jameco, ComponentLink2URL=http://www.jameco.com/Jameco/Products/ProdDS/1989586.pdf?src-supplier=Jameco, ComponentLink3Description=http://www.farnell.com/datasheets/426256.pdf?src-supplier=Element14, ComponentLink3URL=http://www.farnell.com/datasheets/426256.pdf?src-supplier=Element14, ComponentLink4Description=https://www.verical.com/server-webapp/html/getDatasheet?partID=29070&src-supplier=Verical, ComponentLink4URL=https://www.verical.com/server-webapp/html/getDatasheet?partID=29070&src-supplier=Verical, ComponentLink5Description=http://www.farnell.com/datasheets/1678782.pdf?src-supplier=Element14, ComponentLink5URL=http://www.farnell.com/datasheets/1678782.pdf?src-supplier=Element14, ComponentLink6Description=http://www.farnell.com/datasheets/1911175.pdf?src-supplier=Farnell, ComponentLink6URL=http://www.farnell.com/datasheets/1911175.pdf?src-supplier=Farnell, ComponentLink7Description=http://industrial.panasonic.com/cdbs/www-data/pdf/RDA0000/AOA0000C304.pdf?src-supplier=Farnell, ComponentLink7URL=http://industrial.panasonic.com/cdbs/www-data/pdf/RDA0000/AOA0000C304.pdf?src-supplier=Farnell, Manufacturer Part Number=ERJ-6ENF8251V, Packaging="Full Reel", Pricing 1="1=0.1, 10=0.072, 100=0.0275, 1000=0.0121, 2500=0.0105 (USD)", Product Range="PANASONIC - ERJ Series Thick Film Chip Resistors", Stock 1=31520, Supplier 1=Digi-Key, SVHC="To Be Advised"
R8 R9: "RES SMD 22K OHM 1% 1/16W 0402", Case Code - in=0402, Case Code - mm=1005, Case Height="0.35 mm", Case Length="1 mm", Case Width="0.5 mm", Manufacturer=Vishay, Operating Temperature Range="- 55 C to + 155 C", Package / Case="0402 (1005 metric)", Power Rating="63 mW", Resistance=22K, Supplier Part Number 1=541-22.0KLCT-ND, Temperature Coefficient="100 PPM / K", Tolerance="1 %", Voltage Rating="50 V", Brand="Vishay / Dale", ComponentLink1Description=http://uk.rs-online.com/webdocs/0d98/0900766b80d98824.pdf?src-supplier=RSComponents, ComponentLink1URL=http://uk.rs-online.com/webdocs/0d98/0900766b80d98824.pdf?src-supplier=RSComponents, ComponentLink2Description=http://www.mouser.com/ds/2/427/dcrcwe3-109170.pdf?src-supplier=Mouser, ComponentLink2URL=http://www.mouser.com/ds/2/427/dcrcwe3-109170.pdf?src-supplier=Mouser, ComponentLink3Description=http://www.farnell.com/datasheets/2045673.pdf?src-supplier=Element14, ComponentLink3URL=http://www.farnell.com/datasheets/2045673.pdf?src-supplier=Element14, ComponentLink4Description=http://www.vishay.com/docs/20035/dcrcwe3.pdf?src-supplier=Digi-Key, ComponentLink4URL=http://www.vishay.com/docs/20035/dcrcwe3.pdf?src-supplier=Digi-Key, ComponentLink5Description=http://www.alliedelec.com/m/d/0c934d6939ccefa68dbe0b96d821c8cf.pdf?src-supplier=Allied+Electronics, ComponentLink5URL=http://www.alliedelec.com/m/d/0c934d6939ccefa68dbe0b96d821c8cf.pdf?src-supplier=Allied+Electronics, ComponentLink6Description=http://www.vishay.com/docs/20035/dcrcwe3.pdf?src-supplier=Avnet+Europe, ComponentLink6URL=http://www.vishay.com/docs/20035/dcrcwe3.pdf?src-supplier=Avnet+Europe, ComponentLink7Description=https://www.distrelec.biz/Web/Downloads/a_/en/flD-CRCW-e3_data_en.pdf?mime=application%2Fpdf&src-supplier=Distrelec, ComponentLink7URL=https://www.distrelec.biz/Web/Downloads/a_/en/flD-CRCW-e3_data_en.pdf?mime=application%2Fpdf&src-supplier=Distrelec, Factory Pack Quantity=10000, Manufacturer Part Number=CRCW040222K0FKED, Packaging=Reel, Pricing 1="1=0.1, 10=0.036, 100=0.0146, 1000=0.0066, 2500=0.0057, 5000=0.0047 (USD)", Product="Thick Film Resistors SMD", Product Category="Thick Film Resistors - SMD", RoHS=Details, Series=CRCW, Stock 1=6568, Supplier 1=Digi-Key, Unit Weight="0.000023 oz"
R10: "RES SMD 402K OHM 1% 1/10W 0603", Manufacturer=Panasonic, Operating Temperature="-55°C ~ 155°C", Package / Case="0603 (1608 Metric)", Power (Watts)="0.1W, 1/10W", Resistance (Ohms)=402K, Standard Package=1, Supplier Device Package=0603, Supplier Part Number 1=P402KHCT-ND, Temperature Coefficient=±100ppm/°C, Tolerance=±1%, Category=Resistors, ComponentLink1Description=http://www.jameco.com/Jameco/Products/ProdDS/1988102.pdf?src-supplier=Jameco, ComponentLink1URL=http://www.jameco.com/Jameco/Products/ProdDS/1988102.pdf?src-supplier=Jameco, ComponentLink2Description=https://www.alliedelec.com/m/d/623f45ff1957d936ff56d46fd1c28cac.pdf?src-supplier=Allied+Electronics, ComponentLink2URL=https://www.alliedelec.com/m/d/623f45ff1957d936ff56d46fd1c28cac.pdf?src-supplier=Allied+Electronics, ComponentLink3Description=http://www.farnell.com/datasheets/1694929.pdf?src-supplier=Element14, ComponentLink3URL=http://www.farnell.com/datasheets/1694929.pdf?src-supplier=Element14, ComponentLink4Description=http://www.mouser.com/ds/2/315/AOA0000C283-1093288.pdf?src-supplier=Mouser, ComponentLink4URL=http://www.mouser.com/ds/2/315/AOA0000C283-1093288.pdf?src-supplier=Mouser, ComponentLink5Description=http://industrial.panasonic.com/www-data/pdf/AOA0000/AOA0000CE2.pdf?src-supplier=Avnet, ComponentLink5URL=http://industrial.panasonic.com/www-data/pdf/AOA0000/AOA0000CE2.pdf?src-supplier=Avnet, ComponentLink6Description=http://www.farnell.com/datasheets/1678782.pdf?src-supplier=Farnell, ComponentLink6URL=http://www.farnell.com/datasheets/1678782.pdf?src-supplier=Farnell, ComponentLink7Description=http://www.farnell.com/datasheets/1678782.pdf?src-supplier=Element14, ComponentLink7URL=http://www.farnell.com/datasheets/1678782.pdf?src-supplier=Element14, Composition="Thick Film", EDA / CAD Models="Download from Accelerated Designs", Family="Chip Resistor - Surface Mount", Features="Automotive AEC-Q200", Height="0.022\" (0.55mm)", Kits="RSM5H-ND  - RES KIT 100K-1M 1/10W 4850PCS", Manufacturer Part Number=ERJ-3EKF4023V, Number of Terminations=2, Online Catalog="ERJ Series", Other Names="ERJ-3EKF4023 ERJ3EKF4023 P402KHCT", Packaging="Cut Tape (CT)", Pricing 1="1=0.1, 10=0.051, 100=0.0209, 1000=0.0094, 2500=0.0082 (USD)", Series=ERJ, Size / Dimension="0.063\" L x 0.031\" W (1.60mm x 0.80mm)", Stock 1=73987, Supplier 1=Digi-Key